# Altium PCB mega128PCB.PcbDoc (part 1 of 3)
Units mm, origin at the board's own origin, x right, y up, seen from the top; angles counter-clockwise.
Board outline 152.4 x 101.6 mm, 2 copper layers (Top Layer, Bottom Layer); 70 components, 96 nets, 393 pads, 80 vias.
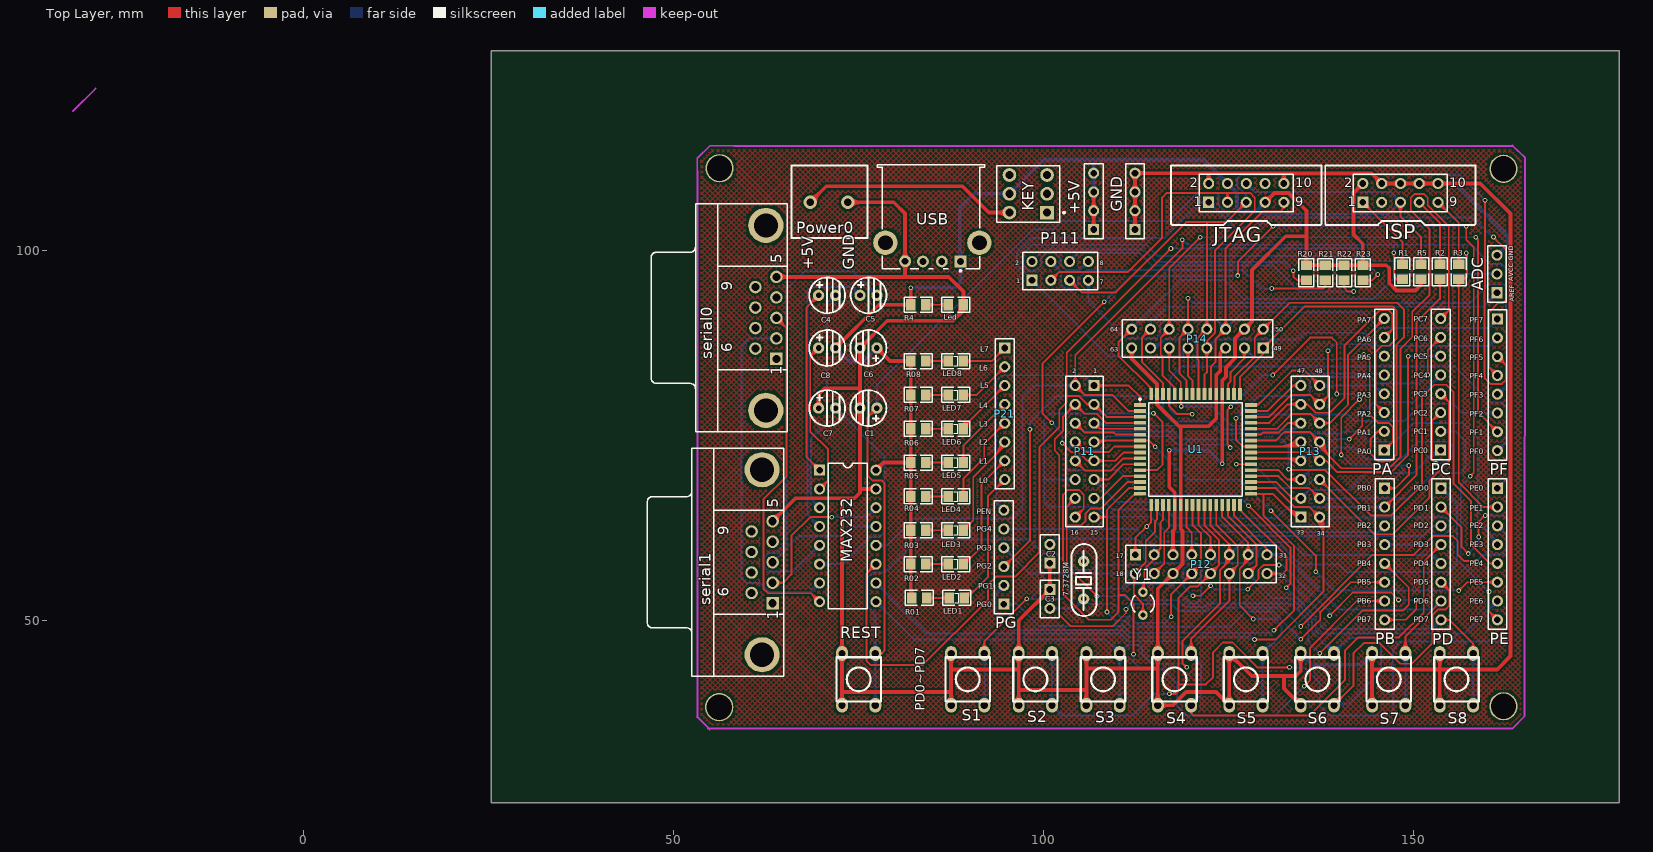
[diagram p0: Top Layer view]
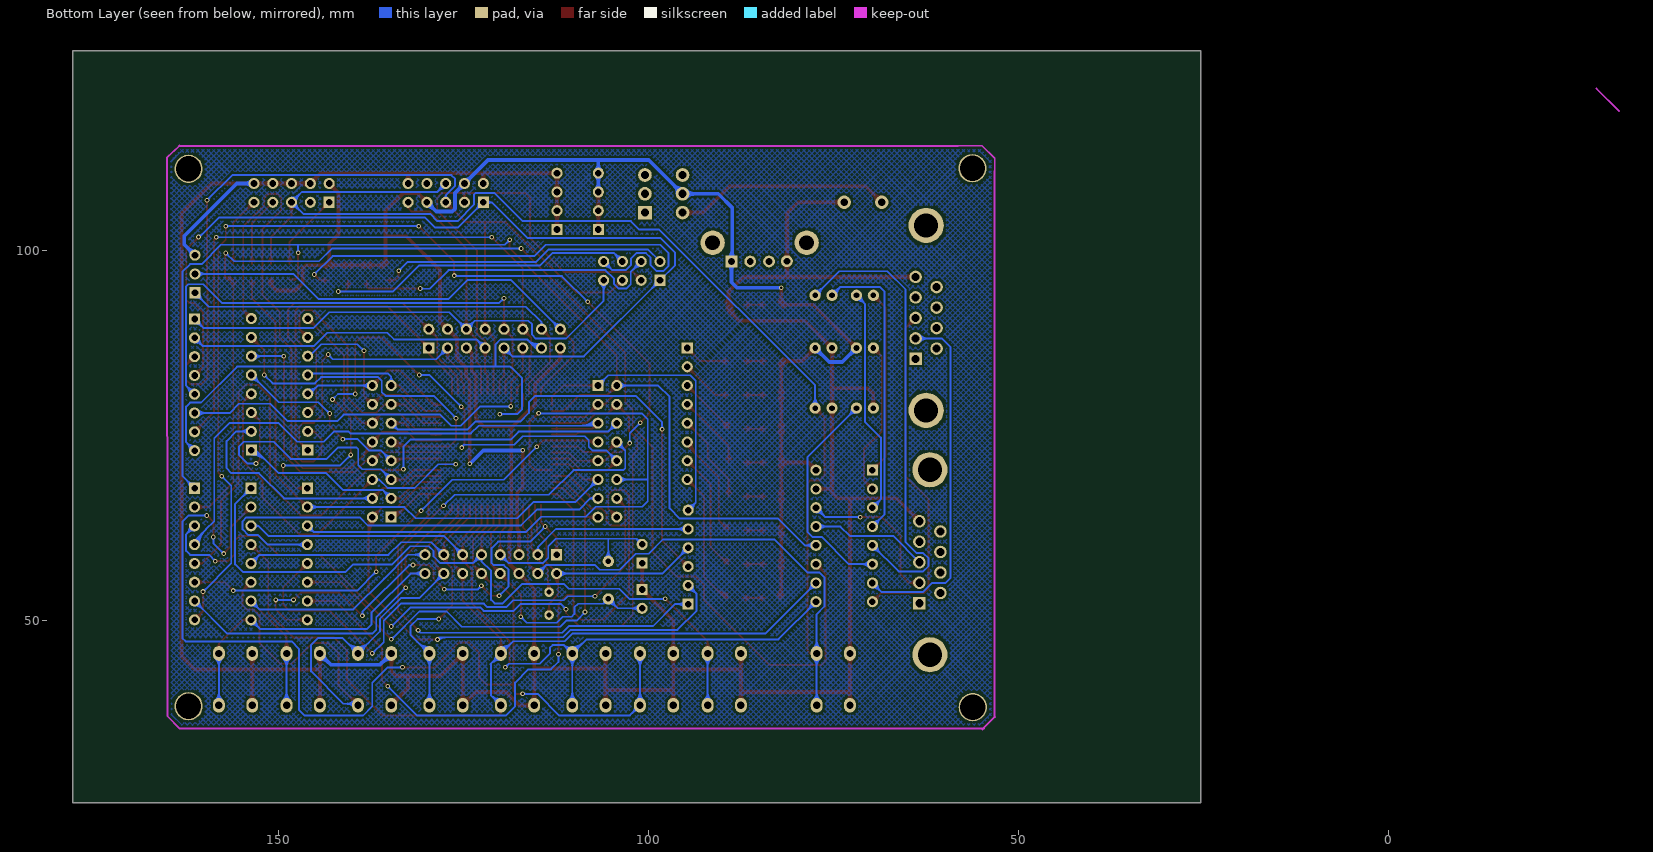
[diagram p1: Bottom Layer view, seen from below]

## Layer stack, top to bottom
Top Layer: signal copper 0.0356
Dielectric: dielectric 0.32, FR-4, Dk 4.8
Bottom Layer: signal copper 0.0356

## Board outline
25.4,25.4 177.8,25.4 177.8,127 25.4,127

## Design rules (kind name [scope] priority, off if disabled: settings)
Clearance [All] p1: gap=0.254
ComponentClearance [All] p1: gap=0.254 collisioncheckmode=3 verticalgap=0.254
PolygonConnect [All] p1: connectstyle=Relief reliefconductorwidth=0.254 reliefentries=4 polygonreliefangle="90 Angle"
RoutingVias [All] p1: holewidth=0.711 width=1.27 viastyle="Through Hole" minholewidth=0.711 minwidth=1.27 maxholewidth=0.711 maxwidth=1.27
SolderMaskExpansion [All] p1: expansion=0.102
TestPointUsage [All] p1: valid=0 allowmultiple=FALSE
Testpoint [All] p1: side=15 testpointundercomponent=TRUE minsize=1.016 maxsize=2.54 preferedsize=1.524 minholesize=0 maxholesize=1.016 preferedholesize=0.813 testpointgrid=0.025 style=1023 order=0123456789
Width GND [InNet('GND')] p1: maxlimit=0.508 minlimit=0.508 preferedwidth=0.508 // GND
Width VCC [InNet('VCC')] p2: maxlimit=0.508 minlimit=0.508 preferedwidth=0.508 // VCC
Width key_vcc [InNet('NetKEY_6')] p3: maxlimit=0.508 minlimit=0.508 preferedwidth=0.508 // VCC
Width [All] p4: maxlimit=0.254 minlimit=0.254 preferedwidth=0.254
17 further rules are at their usual default settings.

## Components (designator, comment, footprint, x,y, rotation, side; value= is the part's Value field where it differs from the comment)
7.3728M "JZ" JZ_ZC 105.461,58.039 r90 top
+5V "PZ_4" HDR-4 108.128,109.22 r90 top
ADC "PZ_3" HDR-3 162.484,100.584 r90 top
C1 "Cap Pol1" C-DJ-4 75.108,81.28 r180 top
C2 "Cap" CPDR 100.889,59.055 r90 top
C3 "Cap" CPDR 100.889,52.959 r270 top
C4 "Cap Pol1" C-DJ-4 72.06,91.44 r0 top
C5 "Cap Pol1" C-DJ-4 77.648,91.44 r0 top
C6 "Cap Pol1" C-DJ-4 75.108,89.408 r180 top
C7 "Cap Pol1" C-DJ-4 72.06,76.2 r0 top
C8 "Cap Pol1" C-DJ-4 72.06,84.328 r0 top
GND "PZ_4" HDR-4 113.716,109.22 r90 top
ISP "ISP" HDR-2x5 148.26,106.68 r0 top (schematic designator P1)
JTAG "JTAG" HDR-2x5 127.432,106.68 r0 top (schematic designator P2)
KEY "Header 3X2" DPDT-6 97.968,107.696 r180 top
Led "LED" TP-0805-R 90.729,91.44 r0 top
LED1 "LED" TP-0805-D 90.856,51.816 r0 top
LED2 "LED" TP-0805-D 90.729,56.388 r0 top
LED3 "LED" TP-0805-D 90.729,60.96 r0 top
LED4 "LED" TP-0805-D 90.729,65.532 r0 top
LED5 "LED" TP-0805-D 90.729,70.104 r0 top
LED6 "LED" TP-0805-D 90.729,74.676 r0 top
LED7 "LED" TP-0805-D 90.729,79.248 r0 top
LED8 "LED" TP-0805-D 90.729,83.82 r0 top
MAX232 "MAX232N" N016 73.584,61.468 r270 top
P11 "Header 8X2" HDR2X8 106.858,81.788 r270 top
P12 "Header 8X2" HDR2X8 112.446,58.928 r0 top
P13 "Header 8X2" HDR2X8 134.798,64.008 r90 top
P14 "Header 8X2" HDR2X8 129.718,86.868 r180 top
P21 "Header 8" HDR1X8 94.793,86.868 r270 top
P111 "Header 4X2" HDR2X4 98.476,96.012 r0 top
PA "PZ_8" HDR-8 146.101,85.725 r90 top
PB "PZ_8" HDR-8 146.101,55.245 r270 top
PC "PZ_8" HDR-8 153.721,85.725 r90 top
PD "PZ_8" HDR-8 153.721,55.245 r270 top
PE "PZ_8" HDR-8 161.341,55.245 r270 top
PF "PZ_8" HDR-8 161.341,78.105 r270 top
PG "PZ_6" HDR-6 95.809,58.42 r90 top
Power0 "Header 2" DYDZ 69.012,107.696 r90 top
R1 "Res2" TP-0805-R 149.784,99.695 r90 top
R01 "Res2" TP-0805-R 80.696,54.356 r180 top
R2 "Res2" TP-0805-R 154.864,99.695 r90 top
R02 "Res2" TP-0805-R 80.569,58.928 r180 top
R3 "Res2" TP-0805-R 157.404,99.695 r90 top
R03 "Res2" TP-0805-R 80.569,63.5 r180 top
R4 "Res2" TP-0805-R 80.569,93.98 r180 top
R04 "Res2" TP-0805-R 80.569,68.072 r180 top
R5 "Res2" TP-0805-R 152.324,99.695 r90 top
R05 "Res2" TP-0805-R 80.569,72.644 r180 top
R06 "Res2" TP-0805-R 80.569,77.216 r180 top
R07 "Res2" TP-0805-R 80.569,81.788 r180 top
R08 "Res2" TP-0805-R 80.569,86.36 r180 top
R20 "Res2" TP-0805-R 136.83,99.568 r90 top
R21 "Res2" TP-0805-R 139.37,99.568 r90 top
R22 "Res2" TP-0805-R 141.91,99.568 r90 top
R23 "Res2" TP-0805-R 144.45,99.568 r90 top
REST "AJKG" an-6*6 80.188,48.26 r90 top
S1 "AJKG" an-6*6 94.92,48.26 r90 top
S2 "AJKG" an-6*6 104.064,48.26 r90 top
S3 "AJKG" an-6*6 113.208,48.26 r90 top
S4 "AJKG" an-6*6 122.86,48.26 r90 top
S5 "AJKG" an-6*6 132.512,48.26 r90 top
S6 "AJKG" an-6*6 142.164,48.26 r90 top
S7 "AJKG" an-6*6 151.816,48.26 r90 top
S8 "AJKG" an-6*6 160.96,48.26 r90 top
serial0 "CKT_9" COM-9 63.932,102.616 r90 top
serial1 "CKT_9" COM-9 63.424,69.596 r90 top
U1 "ATmega128-16AI" 64A 120.574,73.152 r0 top
USB "PZ_4" USB-5V 81.204,101.092 r90 top
Y1 "XTAL" BCY-W2/D3.1 113.462,52.324 r0 top

## Footprints (in the part's own frame and the unit in brackets; to place one, negate y for a bottom-side part, rotate by r counter-clockwise, add the part's x,y. Pads: shape width x height; smd on the part's side, far side on the other; paste and mask are expansions set on the pad)
64A [mm] "QFP; 64 Leads; Body 14 x 14 mm; Pitch 0.8 mm"
  rect 1.6x0.5 smd: 1(-7.5,6) 2(-7.5,5.2) 3(-7.5,4.4) 4(-7.5,3.6) 5(-7.5,2.8) 6(-7.5,2) 7(-7.5,1.2) 8(-7.5,0.4) 9(-7.5,-0.4) 10(-7.5,-1.2) 11(-7.5,-2) 12(-7.5,-2.8) 13(-7.5,-3.6) 14(-7.5,-4.4) 15(-7.5,-5.2) 16(-7.5,-6) 33(7.5,-6) 34(7.5,-5.2) 35(7.5,-4.4) 36(7.5,-3.6) 37(7.5,-2.8) 38(7.5,-2) 39(7.5,-1.2) 40(7.5,-0.4) 41(7.5,0.4) 42(7.5,1.2) 43(7.5,2) 44(7.5,2.8) 45(7.5,3.6) 46(7.5,4.4) 47(7.5,5.2) 48(7.5,6)
  rect 0.5x1.6 smd: 17(-6,-7.5) 18(-5.2,-7.5) 19(-4.4,-7.5) 20(-3.6,-7.5) 21(-2.8,-7.5) 22(-2,-7.5) 23(-1.2,-7.5) 24(-0.4,-7.5) 25(0.4,-7.5) 26(1.2,-7.5) 27(2,-7.5) 28(2.8,-7.5) 29(3.6,-7.5) 30(4.4,-7.5) 31(5.2,-7.5) 32(6,-7.5) 49(6,7.5) 50(5.2,7.5) 51(4.4,7.5) 52(3.6,7.5) 53(2.8,7.5) 54(2,7.5) 55(1.2,7.5) 56(0.4,7.5) 57(-0.4,7.5) 58(-1.2,7.5) 59(-2,7.5) 60(-2.8,7.5) 61(-3.6,7.5) 62(-4.4,7.5) 63(-5.2,7.5) 64(-6,7.5)
  silkscreen extent -7.62,-6.3 6.3,6.92
an-6*6 [mm] "按键"
  oval 2x1.6 hole 1: 1(-9.675,7.381) 1(-2.675,7.381) 2(-9.675,2.881) 2(-2.675,2.881)
  silkscreen extent -9.17,2.13 -3.17,8.13
BCY-W2/D3.1 [mm] "Crystal, Thru-Hole; 2 Leads; Body 3.1 x 8.2 mm (Dia.xH)"
  round 1.3 hole 0.7: 1(0,1.55) 2(0,-1.55)
  silkscreen extent -1.55,-1.19 1.55,1.17
C-DJ-4 [mil] "电容4mm"
  round 60 hole 30: 1(-95,100) 2(-5,100)
  silkscreen extent -145,5 46,195
COM-9 [mm] "串口通信口"
  rect 1.69x1.69 hole 1.09: 1(-17.224,0.002)
  round 1.69 hole 1.09: 2(-14.454,0.002) 3(-11.684,0.002) 4(-8.914,0.002) 5(-6.144,0.002) 6(-15.839,2.842) 7(-13.069,2.842) 8(-10.299,2.842) 9(-7.529,2.842)
  round 4.76 hole 3.26: 10(-24.179,1.422) 11(0.811,1.422)
  silkscreen extent -27.08,-1.48 3.72,16.92
CPDR [mm] "瓷片电容"
  rect 1.5x1.5 hole 0.9: 1(-1.27,0)
  round 1.5 hole 0.9: 2(1.27,0)
  silkscreen extent -2.54,-1.27 2.54,1.27
DPDT-6 [mm] "Double-Pole, Double-Throw Switch; 6 Leads"
  rect 1.85x1.85 hole 1.1: 1(-2.54,2.54)
  round 1.85 hole 1.1: 2(-2.54,0) 3(-2.54,-2.54) 4(2.54,-2.54) 5(2.54,0) 6(2.54,2.54)
  silkscreen extent -4.96,-3.81 4.28,3.81
DYDZ [mil] "接线端子"
  round 71.81 hole 39.37: 1(-45,20) 2(-45,-180)
  silkscreen extent -235,-285 150,120
HDR1X8 [mm] "Connector; Header; 8 Position"
  rect 1.5x1.5 hole 0.9: 1(0,0)
  round 1.5 hole 0.9: 2(2.54,0) 3(5.08,0) 4(7.62,0) 5(10.16,0) 6(12.7,0) 7(15.24,0) 8(17.78,0)
  silkscreen extent -1.27,-1.27 19.05,1.27
HDR2X4 [mm] "Connector; Header; 4x2 Position"
  rect 1.5x1.5 hole 0.9: 1(0,0)
  round 1.5 hole 0.9: 2(0,2.54) 3(2.54,0) 4(2.54,2.54) 5(5.08,0) 6(5.08,2.54) 7(7.62,0) 8(7.62,2.54)
  silkscreen extent -1.27,-1.27 8.89,3.81
HDR2X8 [mm] "Connector; Header; 8x2 Position"
  rect 1.5x1.5 hole 0.9: 1(0,0)
  round 1.5 hole 0.9: 2(0,-2.54) 3(2.54,0) 4(2.54,-2.54) 5(5.08,0) 6(5.08,-2.54) 7(7.62,0) 8(7.62,-2.54) 9(10.16,0) 10(10.16,-2.54) 11(12.7,0) 12(12.7,-2.54) 13(15.24,0) 14(15.24,-2.54) 15(17.78,0) 16(17.78,-2.54)
  silkscreen extent -1.27,-3.81 19.05,1.27
HDR-2x5 [mm] "下载口"
  rect 1.5x1.5 hole 0.9: 1(-5.08,-0.127)
  round 1.5 hole 0.9: 2(-5.08,2.413) 3(-2.54,-0.127) 4(-2.54,2.413) 5(0,-0.127) 6(0,2.413) 7(2.54,-0.127) 8(2.54,2.413) 9(5.08,-0.127) 10(5.08,2.413)
  silkscreen extent -10.16,-3.17 10.16,4.83
HDR-3 [mm] "3排针"
  rect 1.5x1.5 hole 0.9: 1(-6.253,1.165)
  round 1.5 hole 0.9: 2(-3.713,1.165) 3(-1.173,1.165)
  silkscreen extent -7.52,-0.11 0.1,2.43
HDR-4 [mm] "4排针"
  rect 1.5x1.5 hole 0.9: 1(-6.35,1.322)
  round 1.5 hole 0.9: 2(-3.81,1.322) 3(-1.27,1.322) 4(1.27,1.322)
  silkscreen extent -7.62,0.05 2.54,2.59
HDR-6 [mm] "6排针"
  rect 1.5x1.5 hole 0.9: 1(-6.175,1.133)
  round 1.5 hole 0.9: 2(-3.635,1.133) 3(-1.095,1.133) 4(1.445,1.133) 5(3.985,1.133) 6(6.525,1.133)
  silkscreen extent -7.44,-0.14 7.8,2.4
HDR-8 [mm] "8排针"
  rect 1.5x1.5 hole 0.9: 1(-12.669,0.023)
  round 1.5 hole 0.9: 2(-10.129,0.023) 3(-7.589,0.023) 4(-5.049,0.023) 5(-2.509,0.023) 6(0.031,0.023) 7(2.571,0.023) 8(5.111,0.023)
  silkscreen extent -13.94,-1.25 6.38,1.29
JZ_ZC [mil] "晶振"
  round 60 hole 30: 1(-200,0) 2(0,0)
  silkscreen extent -292,-68 92,65
N016 [mm] "DIP; 16 Leads; Row Spacing 7.62 mm; Pitch 2.54 mm"
  rect 1.5x1.5 hole 0.9: 1(-8.89,-3.81)
  round 1.5 hole 0.9: 2(-6.35,-3.81) 3(-3.81,-3.81) 4(-1.27,-3.81) 5(1.27,-3.81) 6(3.81,-3.81) 7(6.35,-3.81) 8(8.89,-3.81) 9(8.89,3.81) 10(6.35,3.81) 11(3.81,3.81) 12(1.27,3.81) 13(-1.27,3.81) 14(-3.81,3.81) 15(-6.35,3.81) 16(-8.89,3.81)
  silkscreen extent -9.85,-2.65 9.85,2.65
TP-0805-D [mm] "贴片二极管"
  rect 1.3x1.5 smd: 1(-3.556,1.27) 2(-1.524,1.27)
  silkscreen extent -4.44,0.25 -0.64,2.29
TP-0805-R [mm] "贴片0805"
  rect 1.3x1.5 smd: 1(-3.556,1.27) 2(-1.524,1.27)
  silkscreen extent -4.44,0.25 -0.64,2.29
USB-5V [mm] "USB接口"
  rect 1.6x1.6 hole 0.92: 1(-2.54,-7.62)
  round 1.6 hole 0.92: 2(-2.54,-5.08) 3(-2.54,-2.54) 4(-2.503,-0.124)
  round 3.3 hole 2: 5(0,2.54) 6(0,-10.16)
  silkscreen extent -3.93,-10.87 10.5,3.63

## Part data
7.3728M: "晶振"
+5V GND USB: "排针——4"
ADC: "排针——3"
C1 C4 C5 C6 C7 C8: "Polarized Capacitor (Radial)"
C2 C3: "Capacitor"
ISP JTAG: library part "Header 5X2", "Header, 5-Pin, Dual row"
KEY: "Header, 3-Pin, Dual row"
Led LED1 LED2 LED3 LED4 LED5 LED6 LED7 LED8: "发光二极管"
MAX232: "Dual EIA-232 Driver/Receiver"
P11 P12 P13 P14: "Header, 8-Pin, Dual row"
P21: "Header, 8-Pin"
P111: "Header, 4-Pin, Dual row"
PA PB PC PD PE PF: "排针——8"
PG: "排针——6"
Power0: "Header, 2-Pin"
R1 R01 R2 R02 R3 R03 R4 R04 R5 R05 R06 R07 R08 R20 R21 R22 R23: "Resistor"
REST S1 S2 S3 S4 S5 S6 S7 S8: "按键开关"
serial0 serial1: "9针串口头_母"
U1: "8-Bit AVR Microcontroller with 128K Bytes of In-System Programmable Flash Memory"
Y1: "Crystal Oscillator"

## Free pads (board coordinates)
  round 3.81 hole 3.4: 1(56.21,38.329) 1(56.261,111.15) 1(162.179,38.456) 1(162.179,111.074)

## Via types
v1: diameter 0.635, hole 0.356, Top Layer to Bottom Layer, 80 vias

## Nets (pads, with @x,y where several pads share a name; then routed paths per layer and width w, separated by ;. In a path a pad name is that pad's centre, name@x,y a point inside that pad or via, vN(x,y) a via of type N, cw(c..) or ccw(c..) an arc to the next point about the centre after c; other vN are vias at no path point)
AREF: ADC.1 P14.14 U1.62 | length 68.7
  Top Layer w0.254: P14.14@113.855,89.408 cw(c112.351,89.408) 113.414,88.344 cw(c114.478,87.281) P14.14@114.478,88.785 ; P14.14@114.109,89.408 cw(c113.218,89.408) 113.848,88.778 cw(c114.478,88.148) P14.14@114.478,89.039 ; P14.14@114.478,89.408 113.335,88.265 113.335,84.975 116.174,82.136 U1.62@116.174,80.652 ; U1.62@116.087,81.289 ccw(c115.877,81.499) 116.174,81.499 ccw(c116.471,81.499) U1.62@116.261,81.289
  Bottom Layer w0.254: P14.14@114.244,89.986 ccw(c114.104,90.332) 114.478,90.332 ; P14.14@114.478,89.408 114.478,90.332 ; P14.14@114.711,89.986 cw(c114.852,90.332) 114.478,90.332 ; ADC.1@160.696,94.331 cw(c159.192,94.331) 160.255,93.267 cw(c161.319,92.204) ADC.1@161.319,93.708 ; ADC.1@160.95,94.331 cw(c160.059,94.331) 160.689,93.701 cw(c161.319,93.071) ADC.1@161.319,93.962 ; ADC.1@161.319,94.331 159.429,92.441 116.587,92.441 114.478,90.332
AVCC: ADC.2 P14.16 U1.64 | length 77.9
  Top Layer w0.254: P14.16@111.315,89.408 cw(c109.811,89.408) 110.874,88.344 cw(c111.938,87.281) P14.16@111.938,88.785 ; P14.16@111.569,89.408 cw(c110.678,89.408) 111.308,88.778 cw(c111.938,88.148) P14.16@111.938,89.039 ; P14.16@111.938,89.408 110.16,87.63 110.16,85.833 114.574,81.419 U1.64@114.574,80.652 ; 114.21,81.782 cw(c113.63,81.202) U1.64@114.451,81.202
  Bottom Layer w0.254: P14.16@111.938,89.408 118.577,96.048 124.491,96.048 127.082,93.457 144.618,93.457 148.032,96.871 ADC.2@161.319,96.871 ; P14.16@111.938,89.777 ccw(c111.938,90.668) 112.568,90.038 ccw(c113.198,89.408) P14.16@112.307,89.408 ; P14.16@111.938,90.031 ccw(c111.938,91.535) 113.001,90.472 ccw(c114.065,89.408) P14.16@112.561,89.408 ; ADC.2@160.878,96.43 ccw(c159.815,95.367) 159.815,96.871 ccw(c159.815,98.375) ADC.2@160.878,97.312 ; ADC.2@161.058,96.61 ccw(c160.428,95.98) 160.428,96.871 ccw(c160.428,97.762) ADC.2@161.058,97.132
GND: ADC.3 C1.2 C2.1 C3.1 C6.2 C7.1 GND.1 GND.2 GND.3 GND.4 ISP.4 ISP.6 ISP.8 ISP.10 JTAG.2 JTAG.10 Led.2 MAX232.15 P12.6 P14.5 P14.15 Power0.2 REST.1 S1.1 S2.1 S3.1 S4.1 S5.1 S6.1 S7.1 S8.1 serial0.5 serial1.5 U1.22 U1.53 U1.63 USB.4 | length 628.7
  Top Layer w0.508: serial1.5@63.422,63.452 66.518,66.548 74.473,66.548 75.235,67.31 C6.2@75.235,86.868 ; serial1.5@63.422,64.043 ccw(c63.422,65.47) 64.431,64.461 ccw(c65.44,63.452) serial1.5@64.013,63.452 ; serial0.5@63.93,96.472 87.221,96.472 89.205,94.488 Led.2@89.205,92.71 89.205,91.948 ; serial0.5@64.348,96.054 cw(c65.357,95.045) 65.357,96.472 cw(c65.357,97.899) serial0.5@64.348,96.89 ; C7.1@69.288,79.099 ccw(c68.42,79.966) 69.647,79.966 ccw(c70.873,79.966) C7.1@70.006,79.099 ; C7.1@69.647,78.74 69.647,80.645 70.409,81.407 75.235,81.407 ; REST.1@72.421,39.171 ccw(c71.489,40.103) 72.807,40.103 ccw(c74.125,40.103) REST.1@73.193,39.171 ; REST.1@72.421,44.999 cw(c71.489,44.067) 72.807,44.067 cw(c74.125,44.067) REST.1@73.193,44.999 ; REST.1@72.421,46.171 ccw(c71.489,47.103) 72.807,47.103 ccw(c74.125,47.103) REST.1@73.193,46.171 ; 72.695,66.548 72.807,66.436 REST.1@72.807,45.585 72.807,38.369 REST.1@72.822,38.354 ; 72.807,40.386 87.539,40.386 ; Power0.2@73.584,106.553 79.807,106.553 81.327,105.032 81.327,96.596 81.204,96.472 ; Power0.2@74.049,106.088 cw(c75.172,104.964) 75.172,106.553 cw(c75.172,108.142) Power0.2@74.049,107.018 ; C1.2@74.876,78.381 cw(c74.008,77.514) 75.235,77.514 cw(c76.461,77.514) C1.2@75.594,78.381 ; C1.2@74.876,79.099 ccw(c74.008,79.966) 75.235,79.966 ccw(c76.461,79.966) C1.2@75.594,79.099 ; C6.2@74.876,86.509 cw(c74.008,85.642) 75.235,85.642 cw(c76.461,85.642) C6.2@75.594,86.509 ; C6.2@74.981,87.122 C6.2@75.235,86.868 ; 75.235,67.818 MAX232.15@77.394,67.818 ; C6.2@75.235,87.376 ccw(c75.235,88.602) 76.102,87.735 ccw(c76.969,86.868) C6.2@75.743,86.868 ; MAX232.15@77.043,67.467 ccw(c76.196,66.621) 76.196,67.818 ccw(c76.196,69.015) MAX232.15@77.043,68.169 ; USB.4@80.941,98.203 cw(c80.009,97.271) 81.327,97.271 cw(c82.646,97.271) USB.4@81.713,98.203 ; USB.4@80.941,98.976 ccw(c80.009,99.908) 81.327,99.908 ccw(c82.646,99.908) USB.4@81.713,98.976 ; S1.1@87.153,39.171 ccw(c86.221,40.103) 87.539,40.103 ccw(c88.857,40.103) S1.1@87.925,39.171 ; S1.1@87.153,44.999 cw(c86.221,44.067) 87.539,44.067 cw(c88.857,44.067) S1.1@87.925,44.999 ; S1.1@87.539,38.585 S1.1@87.539,45.585 ; 87.539,43.434 96.683,43.434 ; 88.139,90.882 ccw(c86.517,92.504) Led.2@88.809,92.594 ; Led.2@88.925,93.09 ccw(c88.249,93.766) 89.205,93.766 ccw(c90.161,93.766) Led.2@89.485,93.09 ; 88.96,91.703 ccw(c88.097,92.566) Led.2@89.317,92.614 ; Led.2@89.018,92.261 cw(c88.85,91.948) 89.205,91.948 ; Led.2@89.392,92.261 ccw(c89.56,91.948) 89.205,91.948 ; S2.1@96.297,39.171 ccw(c95.365,40.103) 96.683,40.103 ccw(c98.001,40.103) S2.1@97.069,39.171 ; S2.1@96.297,44.999 cw(c95.365,44.067) 96.683,44.067 cw(c98.001,44.067) S2.1@97.069,44.999 ; S2.1@96.297,46.171 ccw(c95.365,47.103) 96.683,47.103 ccw(c98.001,47.103) S2.1@97.069,46.171 ; S2.1@96.683,38.585 96.683,38.593 S2.1@96.683,45.585 96.683,50.023 C3.1@100.889,54.229 C2.1@100.889,57.785 ; 96.683,40.64 105.827,40.64 ; C3.1@100.393,54.229 cw(c99.195,54.229) 100.042,53.382 cw(c100.889,52.536) C3.1@100.889,53.733 ; C3.1@100.538,54.58 ccw(c99.691,55.426) 100.889,55.426 ccw(c102.086,55.426) C3.1@101.24,54.58 ; C2.1@100.538,57.434 cw(c99.691,56.588) 100.889,56.588 cw(c102.086,56.588) C2.1@101.24,57.434 ; S3.1@105.441,39.171 ccw(c104.509,40.103) 105.827,40.103 ccw(c107.145,40.103) S3.1@106.213,39.171 ; S3.1@105.441,44.999 cw(c104.509,44.067) 105.827,44.067 cw(c107.145,44.067) S3.1@106.213,44.999 ; S3.1@105.827,38.585 S3.1@105.827,45.585 ; 105.827,43.561 115.479,43.561 ; P14.15@111.587,86.517 cw(c110.74,85.671) 111.938,85.671 cw(c113.135,85.671) P14.15@112.289,86.517 ; P14.15@111.938,86.868 111.938,85.448 115.374,82.012 U1.63@115.374,80.652 115.374,79.241 118.313,76.302 ; GND.1@112.043,103.221 ccw(c111.196,104.067) 112.394,104.067 ccw(c113.591,104.067) GND.1@112.745,103.221 ; GND.2@112.043,105.059 cw(c111.196,104.213) 112.394,104.213 cw(c113.591,104.213) GND.2@112.745,105.059 ; GND.2@112.043,105.761 ccw(c111.196,106.607) 112.394,106.607 ccw(c113.591,106.607) GND.2@112.745,105.761 ; GND.3@112.043,107.599 cw(c111.196,106.753) 112.394,106.753 cw(c113.591,106.753) GND.3@112.745,107.599 ; GND.3@112.043,108.301 ccw(c111.196,109.147) 112.394,109.147 ccw(c113.591,109.147) GND.3@112.745,108.301 ; GND.4@112.043,110.139 cw(c111.196,109.293) 112.394,109.293 cw(c113.591,109.293) 112.745,110.139 cw(c113.591,109.293) 113.591,110.49 cw(c113.591,111.687) GND.4@112.745,110.841 ; GND.1@112.394,102.87 GND.2@112.394,105.41 GND.3@112.394,107.95 GND.4@112.394,110.49 144.323,110.49 ISP.4@145.72,109.093 ISP.6@148.26,109.093 ISP.8@150.8,109.093 ISP.10@153.34,109.093 159.055,109.093 163.119,105.029 ; S4.1@115.093,39.171 ccw(c114.161,40.103) 115.479,40.103 ccw(c116.797,40.103) S4.1@115.865,39.171 ; S4.1@115.093,44.999 cw(c114.161,44.067) 115.479,44.067 cw(c116.797,44.067) S4.1@115.865,44.999 ; S4.1@115.093,46.171 ccw(c114.161,47.103) 115.479,47.103 ccw(c116.797,47.103) S4.1@115.865,46.171 ; S4.1@115.479,38.585 S4.1@115.479,38.593 ; S4.1@115.865,38.199 cw(c116.817,37.247) 116.817,38.593 ; S4.1@115.865,38.971 ccw(c116.777,39.883) 116.777,38.593 ; P12.6@117.03,56.388 cw(c115.832,56.388) 116.679,55.541 cw(c117.526,54.695) P12.6@117.526,55.892 ; P12.6@117.526,56.884 ccw(c117.526,58.081) 118.373,57.235 ccw(c119.219,56.388) P12.6@118.022,56.388 ; JTAG.2@122.001,109.444 ccw(c121.154,110.29) 122.352,110.29 ccw(c123.549,110.29) JTAG.2@122.703,109.444 ; JTAG.2@122.352,109.093 122.352,110.49 ; 123.858,39.858 ccw(c125.131,41.132) S5.1@125.131,39.331 ; P14.5@124.146,86.806 cw(c123.365,86.708) 123.921,86.151 ; 124.34,39.376 cw(c123.75,38.785) S5.1@124.585,38.785 ; P14.5@124.576,86.376 ccw(c124.478,85.595) 123.921,86.151 ; P14.5@124.638,86.868 123.921,86.151 ; S5.1@124.745,39.171 ccw(c123.813,40.103) 125.131,40.103 ccw(c126.449,40.103) S5.1@125.517,39.171 ; S5.1@124.745,44.999 cw(c123.813,44.067) 125.131,44.067 cw(c126.449,44.067) S5.1@125.517,44.999 ; S5.1@125.131,44.839 cw(c125.131,43.038) 126.405,44.312 ; S5.1@125.677,45.385 ccw(c126.512,45.385) 125.922,44.794 ; JTAG.10@132.161,109.444 ccw(c131.314,110.29) 132.512,110.29 ccw(c133.709,110.29) JTAG.10@132.863,109.444 ; 132.512,42.553 132.512,40.856 S6.1@134.783,38.585 ; JTAG.10@132.512,109.093 132.512,110.49 ; 133.51,39.858 ccw(c134.783,41.132) S6.1@134.783,39.331 ; 133.992,39.376 cw(c133.402,38.785) S6.1@134.237,38.785 ; S6.1@134.397,44.999 cw(c133.465,44.067) 134.783,44.067 cw(c136.101,44.067) S6.1@135.169,44.999 ; S6.1@134.783,45.585 134.783,43.216 134.12,42.553 128.163,42.553 S5.1@125.131,45.585 S5.1@125.131,38.585 123.33,40.386 119.304,40.386 117.511,38.593 S4.1@115.479,38.593 ; S7.1@144.049,39.171 ccw(c143.117,40.103) 144.435,40.103 ccw(c145.753,40.103) S7.1@144.821,39.171 ; S7.1@144.049,44.999 cw(c143.117,44.067) 144.435,44.067 cw(c145.753,44.067) S7.1@144.821,44.999 ; S7.1@144.435,38.585 S7.1@144.435,45.585 ; 144.435,43.434 161.341,43.434 163.13,45.223 163.13,105.029 ; ISP.4@145.224,109.093 ccw(c144.026,109.093) 144.873,109.94 ccw(c145.72,110.786) ISP.4@145.72,109.589 ; ISP.4@146.071,108.742 cw(c146.917,107.896) 146.917,109.093 cw(c146.917,110.29) ISP.4@146.071,109.444 ; ISP.6@147.909,108.742 ccw(c147.062,107.896) 147.062,109.093 ccw(c147.062,110.29) ISP.6@147.909,109.444 ; ISP.6@148.611,108.742 cw(c149.457,107.896) 149.457,109.093 cw(c149.457,110.29) ISP.6@148.611,109.444 ; ISP.8@150.449,108.742 ccw(c149.602,107.896) 149.602,109.093 ccw(c149.602,110.29) ISP.8@150.449,109.444 ; ISP.8@151.151,108.742 cw(c151.997,107.896) 151.997,109.093 cw(c151.997,110.29) ISP.8@151.151,109.444 ; ISP.10@152.989,108.742 ccw(c152.142,107.896) 152.142,109.093 ccw(c152.142,110.29) ISP.10@152.989,109.444 ; S8.1@153.193,39.171 ccw(c152.261,40.103) 153.579,40.103 ccw(c154.897,40.103) S8.1@153.965,39.171 ; S8.1@153.193,44.999 cw(c152.261,44.067) 153.579,44.067 cw(c154.897,44.067) S8.1@153.965,44.999 ; S8.1@153.579,38.585 S8.1@153.579,45.585 ; ISP.10@153.691,108.742 cw(c154.537,107.896) 154.537,109.093 cw(c154.537,110.29) ISP.10@153.691,109.444 ; C6.2@75.235,86.868 78.918,90.551 87.808,90.551 89.205,91.948 ; S4.1@115.479,38.593 115.479,45.307 S4.1@115.479,45.585 115.479,54.341 P12.6@117.526,56.388 118.796,57.658 118.796,62.179 118.574,62.401 U1.22@118.574,65.652 118.574,76.041 118.313,76.302 ; 118.313,76.302 122.352,76.302 123.374,77.324 U1.53@123.374,80.652 123.374,83.204 123.921,83.752 123.921,86.151
  Bottom Layer w0.508: S6.1@134.783,44.839 cw(c134.783,42.983) 136.095,44.295 ; S6.1@134.783,45.585 134.806,45.585 136.322,44.069 142.926,44.069 144.435,45.578 S7.1@144.435,45.585 ; S6.1@135.329,45.385 ccw(c136.109,45.385) 135.558,44.833 ; 143.173,44.316 cw(c144.435,43.054) S7.1@144.435,44.839 ; 143.64,44.783 ccw(c143.037,45.385) S7.1@143.889,45.385 ; ISP.10@153.34,109.093 155.656,109.093 162.768,101.981 162.768,100.861 ADC.3@161.319,99.411 ; ISP.10@153.691,108.742 cw(c154.537,107.896) 154.537,109.093 cw(c154.537,110.29) ISP.10@153.691,109.444 ; ADC.3@161.319,99.907 ccw(c161.319,101.104) 162.166,100.258 ccw(c163.012,99.411) ADC.3@161.815,99.411
L0: LED1.2 P21.8 | length 26.5
  Top Layer w0.254: LED1.2@89.332,53.086 89.713,53.086 92.507,55.88 92.507,66.802 P21.8@94.793,69.088 ; LED1.2@89.332,53.201 ccw(c89.332,54.398) 90.179,53.552 ; LED1.2@89.332,53.455 ccw(c89.332,55.266) 90.612,53.985 ; LED1.2@89.332,53.709 ccw(c89.332,56.133) 91.046,54.419 ; P21.8@94.17,69.088 cw(c92.666,69.088) 93.729,68.024 cw(c94.793,66.961) P21.8@94.793,68.465 ; P21.8@94.424,69.088 cw(c93.533,69.088) 94.163,68.458 cw(c94.793,67.828) P21.8@94.793,68.719
L1: LED2.2 P21.7 | length 23
  Top Layer w0.254: LED2.2@89.205,57.658 89.332,57.658 91.629,59.956 91.629,68.465 P21.7@94.793,71.628 ; LED2.2@89.205,58.027 ccw(c89.205,59.224) 90.052,58.378 ; LED2.2@89.205,58.281 ccw(c89.205,60.092) 90.485,58.811 ; LED2.2@89.728,57.758 cw(c90.442,57.758) 89.937,58.263 ; P21.7@94.17,71.628 cw(c92.666,71.628) 93.729,70.564 cw(c94.793,69.501) P21.7@94.793,71.005 ; P21.7@94.424,71.628 cw(c93.533,71.628) 94.163,70.998 cw(c94.793,70.368) P21.7@94.793,71.259
L2: LED3.2 P21.6 | length 21.9
  Top Layer w0.254: LED3.2@89.205,62.23 90.54,63.566 90.54,69.408 94.793,73.66 P21.6@94.793,74.168 ; LED3.2@89.205,62.599 ccw(c89.205,63.49) LED3.2@89.835,62.86 ; LED3.2@89.205,62.853 ccw(c89.205,64.357) 90.268,63.294 ; LED3.2@89.728,62.33 cw(c90.749,62.33) 90.027,63.052 ; 93.37,72.237 ccw(c91.439,74.168) P21.6@94.17,74.168 ; 93.804,72.671 ccw(c92.307,74.168) P21.6@94.424,74.168 ; 94.237,73.104 ccw(c93.174,74.168) P21.6@94.678,74.168
L3: LED4.2 P21.5 | length 18
  Top Layer w0.254: LED4.2@88.835,67.272 ccw(c87.942,68.165) 89.205,68.165 ccw(c90.467,68.165) LED4.2@89.575,67.272 ; LED4.2@89.205,66.802 89.205,69.215 92.021,72.032 92.021,73.937 P21.5@94.793,76.708 ; P21.5@94.17,76.708 cw(c92.666,76.708) 93.729,75.644 cw(c94.793,74.581) P21.5@94.793,76.085 ; P21.5@94.424,76.708 cw(c93.533,76.708) 94.163,76.078 cw(c94.793,75.448) P21.5@94.793,76.339
L4: LED5.2 P21.4 | length 15.9
  Top Layer w0.254: LED5.2@88.835,71.844 ccw(c87.942,72.737) 89.205,72.737 ccw(c90.467,72.737) LED5.2@89.575,71.844 ; LED5.2@89.205,71.374 89.205,73.66 P21.4@94.793,79.248 ; P21.4@94.17,79.248 cw(c92.666,79.248) 93.729,78.184 cw(c94.793,77.121) P21.4@94.793,78.625 ; P21.4@94.424,79.248 cw(c93.533,79.248) 94.163,78.618 cw(c94.793,77.988) P21.4@94.793,78.879
L5: LED6.2 P21.3 | length 16.3
  Top Layer w0.254: LED6.2@89.084,76.555 ccw(c89.047,76.708) 89.205,76.708 ; LED6.2@89.205,75.946 89.205,76.708 ; LED6.2@89.205,76.569 ccw(c89.205,77.46) 89.835,76.83 ; LED6.2@89.279,76.564 ccw(c89.352,77.069) 89.713,76.708 ; LED6.2@89.326,76.555 cw(c89.362,76.708) 89.205,76.708 ; LED6.2@89.474,76.046 cw(c90.495,76.046) 89.773,76.768 ; LED6.2@89.659,76.305 cw(c89.949,76.471) 89.713,76.708 ; LED6.2@89.728,76.046 cw(c91.362,76.046) 90.207,77.202 ; P21.3@94.17,81.788 cw(c92.666,81.788) 93.729,80.724 cw(c94.793,79.661) P21.3@94.793,81.165 ; P21.3@94.424,81.788 cw(c93.533,81.788) 94.163,81.158 cw(c94.793,80.528) P21.3@94.793,81.419 ; P21.3@94.793,81.788 89.713,76.708 ; 89.205,76.708 89.713,76.708
L6: LED7.2 P21.2 | length 12.9
  Top Layer w0.254: LED7.2@89.205,80.518 90.983,80.518 P21.2@94.793,84.328 ; LED7.2@89.575,80.148 cw(c90.467,79.255) 90.467,80.518 cw(c90.467,81.781) LED7.2@89.575,80.888 ; P21.2@94.17,84.328 cw(c92.666,84.328) 93.729,83.264 cw(c94.793,82.201) P21.2@94.793,83.705 ; P21.2@94.424,84.328 cw(c93.533,84.328) 94.163,83.698 cw(c94.793,83.068) P21.2@94.793,83.959
L7: LED8.2 P21.1 | length 12.1
  Top Layer w0.254: LED8.2@89.205,85.09 93.015,85.09 P21.1@94.793,86.868 ; LED8.2@89.575,84.72 cw(c90.467,83.827) 90.467,85.09 cw(c90.467,86.353) LED8.2@89.575,85.46 ; P21.1@94.17,86.868 cw(c92.666,86.868) 93.729,85.804 cw(c94.793,84.741) P21.1@94.793,86.245 ; P21.1@94.424,86.868 cw(c93.533,86.868) 94.163,86.238 cw(c94.793,85.608) P21.1@94.793,86.499
NetC4_1: C4.1 MAX232.1 | length 32.7
  Top Layer w0.254: C4.1@69.012,93.98 cw(c67.479,93.98) 68.563,92.896 cw(c69.647,91.812) C4.1@69.647,93.345 ; MAX232.1@69.151,70.358 ccw(c67.647,70.358) 68.71,71.422 ccw(c69.774,72.485) MAX232.1@69.774,70.981 ; C4.1@69.266,93.98 cw(c68.346,93.98) 68.996,93.33 cw(c69.647,92.679) C4.1@69.647,93.599 ; MAX232.1@69.405,70.358 ccw(c68.514,70.358) 69.144,70.988 ccw(c69.774,71.618) MAX232.1@69.774,70.727 ; C4.1@69.647,93.98 67.996,92.329 67.996,72.136 MAX232.1@69.774,70.358
NetC4_2: C4.2 MAX232.3 | length 38.2
  Bottom Layer w0.254: MAX232.3@69.151,65.278 ccw(c67.647,65.278) 68.71,66.342 ccw(c69.774,67.405) MAX232.3@69.774,65.901 ; MAX232.3@69.405,65.278 ccw(c68.514,65.278) 69.144,65.908 ccw(c69.774,66.538) MAX232.3@69.774,65.647 ; MAX232.3@69.774,65.278 68.631,66.421 68.631,74.752 70.79,76.911 70.79,92.837 C4.2@71.933,93.98 ; C4.2@71.298,93.98 cw(c69.765,93.98) 70.849,92.896 cw(c71.933,91.812) C4.2@71.933,93.345 ; C4.2@71.552,93.98 cw(c70.632,93.98) 71.282,93.33 cw(c71.933,92.679) C4.2@71.933,93.599
NetC5_1: C5.1 MAX232.4 | length 47.9
  Bottom Layer w0.254: MAX232.4@69.151,62.738 ccw(c67.647,62.738) 68.71,63.802 ccw(c69.774,64.865) MAX232.4@69.774,63.361 ; MAX232.4@69.405,62.738 ccw(c68.514,62.738) 69.144,63.368 ccw(c69.774,63.998) MAX232.4@69.774,63.107 ; MAX232.4@69.774,62.738 68.123,64.389 68.123,94.488 68.758,95.123 74.092,95.123 C5.1@75.235,93.98 ; C5.1@74.6,93.98 ccw(c73.067,93.98) 74.151,95.064 ccw(c75.235,96.148) C5.1@75.235,94.615 ; C5.1@74.854,93.98 ccw(c73.934,93.98) 74.584,94.63 ccw(c75.235,95.281) C5.1@75.235,94.361
NetC5_2: C5.2 MAX232.5 | length 70.8
  Bottom Layer w0.254: MAX232.5@69.151,60.198 cw(c67.647,60.198) 68.71,59.134 cw(c69.774,58.071) MAX232.5@69.774,59.575 ; MAX232.5@69.405,60.198 cw(c68.514,60.198) 69.144,59.568 cw(c69.774,58.938) MAX232.5@69.774,59.829 ; MAX232.5@69.774,60.198 66.243,56.667 62.916,56.667 62.179,57.404 62.179,58.42 62.916,59.157 63.805,59.157 65.278,60.63 65.278,94.767 67.742,97.231 74.27,97.231 C5.2@77.521,93.98 ; C5.2@76.886,93.98 ccw(c75.353,93.98) 76.437,95.064 ccw(c77.521,96.148) C5.2@77.521,94.615 ; C5.2@77.14,93.98 ccw(c76.22,93.98) 76.87,94.63 ccw(c77.521,95.281) C5.2@77.521,94.361
NetC7_2: C7.2 MAX232.6 | length 37.7
  Bottom Layer w0.254: MAX232.6@69.774,57.658 72.949,57.658 76.62,61.329 77.89,61.329 78.537,61.976 78.537,72.136 C7.2@71.933,78.74 ; MAX232.6@70.035,57.397 cw(c70.665,56.767) 70.665,57.658 cw(c70.665,58.549) MAX232.6@70.035,57.919 ; MAX232.6@70.214,57.217 cw(c71.278,56.154) 71.278,57.658 cw(c71.278,59.162) MAX232.6@70.214,58.099 ; C7.2@71.933,78.105 cw(c71.933,76.572) 73.017,77.656 cw(c74.101,78.74) C7.2@72.568,78.74 ; C7.2@71.933,78.359 cw(c71.933,77.439) 72.583,78.09 cw(c73.234,78.74) C7.2@72.314,78.74
NetC8_1: C8.1 MAX232.2 | length 28.6
  Top Layer w0.254: C8.1@69.012,86.868 cw(c67.479,86.868) 68.563,85.784 cw(c69.647,84.7) C8.1@69.647,86.233 ; C8.1@69.266,86.868 cw(c68.346,86.868) 68.996,86.218 cw(c69.647,85.567) C8.1@69.647,86.487 ; C8.1@69.647,86.868 68.504,85.725 68.504,75.565 70.917,73.152 70.917,68.961 MAX232.2@69.774,67.818 ; MAX232.2@69.774,68.187 ccw(c69.774,69.078) 70.404,68.448 ccw(c71.034,67.818) MAX232.2@70.143,67.818 ; MAX232.2@69.774,68.441 ccw(c69.774,69.945) 70.837,68.882 ccw(c71.901,67.818) MAX232.2@70.397,67.818
NetKEY_6: KEY.6 Power0.1 | length 34.3
  Top Layer w0.508: Power0.1@68.504,106.553 70.663,108.712 89.078,108.712 92.634,105.156 KEY.6@95.428,105.156 ; Power0.1@68.504,107.211 ccw(c68.504,108.8) 69.627,107.676 ccw(c70.75,106.553) Power0.1@69.162,106.553 ; KEY.6@94.953,104.682 ccw(c93.808,103.536) 93.808,105.156 ccw(c93.808,106.776) KEY.6@94.953,105.63
NetLED1_1: LED1.1 R01.1 | length 7
  Top Layer w0.254: R01.1@84.252,53.086 LED1.1@87.3,53.086 ; R01.1@84.622,52.716 cw(c85.514,51.823) 85.514,53.086 cw(c85.514,54.349) R01.1@84.622,53.456 ; LED1.1@86.93,52.716 ccw(c86.037,51.823) 86.037,53.086 ccw(c86.037,54.349) LED1.1@86.93,53.456
NetLED2_1: LED2.1 R02.1 | length 7
  Top Layer w0.254: R02.1@84.125,57.658 LED2.1@87.173,57.658 ; R02.1@84.495,57.288 cw(c85.387,56.395) 85.387,57.658 cw(c85.387,58.921) R02.1@84.495,58.028 ; LED2.1@86.803,57.288 ccw(c85.91,56.395) 85.91,57.658 ccw(c85.91,58.921) LED2.1@86.803,58.028
NetLED3_1: LED3.1 R03.1 | length 7
  Top Layer w0.254: R03.1@84.125,62.23 LED3.1@87.173,62.23 ; R03.1@84.495,61.86 cw(c85.387,60.967) 85.387,62.23 cw(c85.387,63.493) R03.1@84.495,62.6 ; LED3.1@86.803,61.86 ccw(c85.91,60.967) 85.91,62.23 ccw(c85.91,63.493) LED3.1@86.803,62.6
NetLED4_1: LED4.1 R04.1 | length 7
  Top Layer w0.254: R04.1@84.125,66.802 LED4.1@87.173,66.802 ; R04.1@84.495,66.432 cw(c85.387,65.539) 85.387,66.802 cw(c85.387,68.065) R04.1@84.495,67.172 ; LED4.1@86.803,66.432 ccw(c85.91,65.539) 85.91,66.802 ccw(c85.91,68.065) LED4.1@86.803,67.172
NetLED5_1: LED5.1 R05.1 | length 7
  Top Layer w0.254: R05.1@84.125,71.374 LED5.1@87.173,71.374 ; R05.1@84.495,71.004 cw(c85.387,70.111) 85.387,71.374 cw(c85.387,72.637) R05.1@84.495,71.744 ; LED5.1@86.803,71.004 ccw(c85.91,70.111) 85.91,71.374 ccw(c85.91,72.637) LED5.1@86.803,71.744
NetLED6_1: LED6.1 R06.1 | length 7
  Top Layer w0.254: R06.1@84.125,75.946 LED6.1@87.173,75.946 ; R06.1@84.495,75.576 cw(c85.387,74.683) 85.387,75.946 cw(c85.387,77.209) R06.1@84.495,76.316 ; LED6.1@86.803,75.576 ccw(c85.91,74.683) 85.91,75.946 ccw(c85.91,77.209) LED6.1@86.803,76.316
NetLED7_1: LED7.1 R07.1 | length 7
  Top Layer w0.254: R07.1@84.125,80.518 LED7.1@87.173,80.518 ; R07.1@84.495,80.148 cw(c85.387,79.255) 85.387,80.518 cw(c85.387,81.781) R07.1@84.495,80.888 ; LED7.1@86.803,80.148 ccw(c85.91,79.255) 85.91,80.518 ccw(c85.91,81.781) LED7.1@86.803,80.888
NetLED8_1: LED8.1 R08.1 | length 7
  Top Layer w0.254: R08.1@84.125,85.09 LED8.1@87.173,85.09 ; R08.1@84.495,84.72 cw(c85.387,83.827) 85.387,85.09 cw(c85.387,86.353) R08.1@84.495,85.46 ; LED8.1@86.803,84.72 ccw(c85.91,83.827) 85.91,85.09 ccw(c85.91,86.353) LED8.1@86.803,85.46
NetLed_1: Led.1 R4.1 | length 7
  Top Layer w0.254: R4.1@84.125,92.71 Led.1@87.173,92.71 ; R4.1@84.495,92.34 cw(c85.387,91.447) 85.387,92.71 cw(c85.387,93.973) R4.1@84.495,93.08 ; Led.1@86.803,92.34 ccw(c85.91,91.447) 85.91,92.71 ccw(c85.91,93.973) Led.1@86.803,93.08
NetP1_1: ISP.1 R1.2 | length 16.3
  Top Layer w0.254: ISP.1@143.18,105.93 cw(c143.18,104.426) 144.243,105.489 cw(c145.307,106.553) ISP.1@143.803,106.553 ; ISP.1@143.18,106.184 cw(c143.18,105.293) 143.81,105.923 cw(c144.44,106.553) ISP.1@143.549,106.553 ; ISP.1@143.18,106.553 148.514,101.219 R1.2@148.514,98.171 ; R1.2@148.144,98.541 ccw(c147.251,99.434) 148.514,99.434 ccw(c149.776,99.434) R1.2@148.884,98.541
NetP1_7: ISP.7 R2.2 | length 11.5
  Top Layer w0.254: ISP.7@150.8,106.553 153.594,103.759 R2.2@153.594,98.171 ; R2.2@153.224,98.541 ccw(c152.331,99.434) 153.594,99.434 ccw(c154.856,99.434) R2.2@153.964,98.541
NetP1_9: ISP.9 R3.2 | length 15.3
  Top Layer w0.254: ISP.9@153.34,105.93 cw(c153.34,104.426) 154.403,105.489 cw(c155.467,106.553) ISP.9@153.963,106.553 ; ISP.9@153.34,106.184 cw(c153.34,105.293) 153.97,105.923 cw(c154.6,106.553) ISP.9@153.709,106.553 ; ISP.9@153.34,106.553 156.134,103.759 R3.2@156.134,98.171 ; R3.2@155.764,98.541 ccw(c154.871,99.434) 156.134,99.434 ccw(c157.396,99.434) R3.2@156.504,98.541
NetP111_2: P111.2 R20.1 | length 43.1
  Top Layer w0.254: v1@133.647,97.147 cw(c133.261,96.761) 133.807,96.761 ; v1(133.782,97.282) 133.807,97.257 133.807,96.52 134.315,96.012 ; 133.807,96.883 cw(c134.18,96.883) v1@133.917,97.147 ; R20.1@135.064,95.67 ccw(c134.315,95.021) 134.315,96.012 ; R20.1@135.064,96.354 cw(c134.315,97.003) 134.315,96.012 ; R20.1@135.56,96.012 134.315,96.012
  Bottom Layer w0.254: P111.2@98.476,98.552 100.115,100.191 113.52,100.191 115.21,98.501 132.563,98.501 v1(133.782,97.282) ; v1@133.591,97.282 ccw(c133.131,97.282) 133.457,97.607 ccw(c133.782,97.932) v1@133.782,97.472
NetP111_4: P111.4 R21.1 | length 49.3
  Top Layer w0.254: v1@130.861,94.869 v1(130.886,94.894) 137.846,94.894 138.1,95.148 ; v1@131.021,94.76 cw(c131.346,94.434) 131.346,94.894 cw(c131.346,95.354) v1@131.021,95.029 ; R21.1@137.857,95.549 cw(c137.648,95.148) 138.1,95.148 ; R21.1@138.1,96.012 138.1,95.148 ; R21.1@138.342,95.549 ccw(c138.551,95.148) 138.1,95.148
  Bottom Layer w0.254: P111.4@101.016,97.929 cw(c101.016,96.425) 102.079,97.488 cw(c103.143,98.552) P111.4@101.639,98.552 ; P111.4@101.016,98.183 cw(c101.016,97.292) 101.646,97.922 cw(c102.276,98.552) P111.4@101.385,98.552 ; P111.4@101.016,98.552 102.425,97.143 102.425,95.504 103.048,94.881 104.064,94.881 104.687,95.504 104.687,96.266 104.724,96.266 105.842,97.384 127.051,97.384 129.565,94.869 v1@130.861,94.869 ; 130.365,94.869 ccw(c130.365,95.416) v1@130.751,95.029 ; 130.488,94.869 cw(c130.488,94.496) v1@130.751,94.76
NetP111_6: P111.6 R22.1 | length 50.1
  Top Layer w0.254: R22.1@140.336,95.586 cw(c139.915,94.996) 140.64,94.996 ; R22.1@140.64,96.012 140.64,94.996 ; R22.1@140.944,95.586 ccw(c141.365,94.996) 140.64,94.996 ; v1@141.8,94.353 ccw(c141.475,94.028) 141.475,94.488 ccw(c141.475,94.948) v1@141.8,94.623 ; v1(141.935,94.488) 141.148,94.488 140.64,94.996
  Bottom Layer w0.254: P111.6@103.556,98.552 104.687,99.683 113.012,99.683 114.702,97.993 131.064,97.993 134.569,94.488 v1(141.935,94.488) ; P111.6@103.556,98.921 ccw(c103.556,99.812) 104.186,99.182 ccw(c104.816,98.552) P111.6@103.925,98.552 ; P111.6@103.556,99.175 ccw(c103.556,100.679) 104.619,99.616 ccw(c105.683,98.552) P111.6@104.179,98.552 ; v1@141.8,94.353 ccw(c141.475,94.028) 141.475,94.488 ccw(c141.475,94.948) v1@141.8,94.623
NetP111_8: P111.8 R23.1 | length 73.6
  Top Layer w0.254: R23.1@143.18,96.012 144.424,96.012 ; R23.1@143.675,95.67 cw(c144.424,95.021) 144.424,96.012 ; R23.1@143.675,96.354 ccw(c144.424,97.003) 144.424,96.012 ; v1@145.021,96.799 cw(c144.561,96.799) 144.887,96.474 cw(c145.212,96.149) v1@145.212,96.609 ; v1(145.212,96.799) 144.424,96.012
  Bottom Layer w0.254: P111.8@105.473,98.552 cw(c103.969,98.552) 105.032,97.488 cw(c106.096,96.425) P111.8@106.096,97.929 ; P111.8@105.727,98.552 cw(c104.836,98.552) 105.466,97.922 cw(c106.096,97.292) P111.8@106.096,98.183 ; P111.8@106.096,98.552 104.965,97.421 103.036,97.421 102.413,98.044 102.413,98.933 101.663,99.683 100.369,99.683 99.746,99.06 99.746,98.044 98.984,97.282 97.968,97.282 97.333,97.917 97.333,99.72 98.425,100.813 113.919,100.813 115.443,99.289 142.723,99.289 v1(145.212,96.799) ; v1@145.021,96.799 ccw(c144.561,96.799) 144.887,97.125 ccw(c145.212,97.45) v1@145.212,96.99
P\E\N\: P11.1 PG.6 U1.1 | length 51.5
  Top Layer w0.254: P11.1@106.858,81.788 111.557,81.788 113.074,80.271 U1.1@113.074,79.152 ; P11.1@107.119,81.527 cw(c107.749,80.897) 107.749,81.788 cw(c107.749,82.679) P11.1@107.119,82.049 ; P11.1@107.298,81.347 cw(c108.362,80.284) 108.362,81.788 cw(c108.362,83.292) P11.1@107.298,82.229 ; U1.1@112.987,79.239 ccw(c112.777,79.449) 113.074,79.449 ccw(c113.371,79.449) U1.1@113.161,79.239
  Bottom Layer w0.254: PG.6@94.053,64.961 ccw(c92.675,64.997) 93.65,65.971 ; PG.6@94.307,64.955 ccw(c93.491,64.976) 94.068,65.553 ccw(c94.645,66.13) PG.6@94.666,65.314 ; PG.6@94.66,65.568 cw(c94.624,66.945) 93.65,65.971 ; PG.6@94.676,64.945 93.65,65.971 ; P11.1@106.235,81.788 ccw(c104.731,81.788) 105.794,82.852 ccw(c106.858,83.915) P11.1@106.858,82.411 ; P11.1@106.489,81.788 ccw(c105.598,81.788) 106.228,82.418 ccw(c106.858,83.048) P11.1@106.858,82.157 ; P11.1@106.858,81.788 105.461,83.185 94.412,83.185 93.65,82.423 93.65,65.971
PA0: P14.3 PA.1 U1.51 | length 52.8
  Top Layer w0.254: U1.51@124.887,81.289 ccw(c124.677,81.499) 124.974,81.499 ccw(c125.271,81.499) U1.51@125.061,81.289 ; U1.51@124.974,80.652 124.974,82.01 125.318,82.355 125.318,83.602 127.178,85.462 ; P14.3@126.759,86.407 cw(c125.903,85.462) 127.178,85.462 ; P14.3@126.93,86.595 cw(c126.422,86.035) 127.178,86.035 cw(c127.933,86.035) P14.3@127.426,86.595 ; P14.3@127.178,86.868 127.178,85.462 ; P14.3@127.596,86.407 ccw(c128.453,85.462) 127.178,85.462 ; v1@143.307,85.788 cw(c143.307,85.329) 143.632,85.654 cw(c143.957,85.979) v1@143.497,85.979 ; v1(143.307,85.979) 144.12,85.166 144.12,77.851 145.237,76.733 146.685,76.733 147.218,76.2 147.218,74.197 PA.1@146.078,73.056 ; PA.1@146.078,73.425 ccw(c146.078,74.316) 146.708,73.686 ccw(c147.338,73.056) PA.1@146.447,73.056 ; PA.1@146.078,73.679 ccw(c146.078,75.183) 147.141,74.12 ccw(c148.205,73.056) PA.1@146.701,73.056
  Bottom Layer w0.254: P14.3@127.178,86.245 cw(c127.178,84.741) 128.241,85.804 cw(c129.305,86.868) P14.3@127.801,86.868 ; P14.3@127.178,86.499 cw(c127.178,85.608) 127.808,86.238 cw(c128.438,86.868) P14.3@127.547,86.868 ; P14.3@127.178,86.868 128.702,85.344 142.672,85.344 v1(143.307,85.979) ; v1@143.116,85.979 cw(c142.656,85.979) 142.982,85.654 cw(c143.307,85.329) v1@143.307,85.788
PA1: P14.2 PA.2 U1.50 | length 70.8
  Top Layer w0.254: U1.50@125.687,81.289 ccw(c125.477,81.499) 125.774,81.499 ccw(c126.071,81.499) U1.50@125.861,81.289 ; U1.50@125.774,80.652 125.774,81.794 125.826,81.847 125.826,82.951 128.575,85.7 128.575,88.265 P14.2@129.718,89.408 133.293,92.983 147.825,92.983 148.733,92.075 148.733,88.286 147.726,87.28 147.726,72.415 146.812,71.501 145.339,71.501 144.196,72.644 144.196,74.549 144.932,75.286 144.932,75.317 145.212,75.596 ; P14.2@129.095,89.408 cw(c127.591,89.408) 128.654,88.344 cw(c129.718,87.281) P14.2@129.718,88.785 ; P14.2@129.349,89.408 cw(c128.458,89.408) 129.088,88.778 cw(c129.718,88.148) P14.2@129.718,89.039 ; P14.2@129.718,89.777 ccw(c129.718,90.668) 130.348,90.038 ccw(c130.978,89.408) P14.2@130.087,89.408 ; P14.2@129.718,90.031 ccw(c129.718,91.535) 130.781,90.472 ccw(c131.845,89.408) P14.2@130.341,89.408 ; 144.97,75.355 cw(c145.588,74.737) PA.2@146.021,75.496 ; 145.206,75.59 cw(c145.759,75.037) PA.2@146.147,75.717 ; PA.2@145.487,75.398 ccw(c145.212,75.306) 145.212,75.596 ; PA.2@145.487,75.794 cw(c145.212,75.886) 145.212,75.596 ; PA.2@146.078,75.596 145.212,75.596
PA2: P14.1 PA.3 U1.49 | length 52.7
  Top Layer w0.254: U1.49@126.487,81.289 ccw(c126.277,81.499) 126.574,81.499 ccw(c126.871,81.499) U1.49@126.661,81.289 ; U1.49@126.574,80.652 126.574,82.911 129.718,86.055 ; P14.1@129.556,86.266 cw(c129.499,86.055) 129.718,86.055 ; P14.1@129.718,87.237 ccw(c129.718,88.128) 130.348,87.498 ccw(c130.978,86.868) P14.1@130.087,86.868 ; P14.1@129.718,87.491 ccw(c129.718,88.995) 130.781,87.932 ccw(c131.845,86.868) P14.1@130.341,86.868 ; P14.1@129.88,86.266 ccw(c129.936,86.055) 129.718,86.055 ; PA.3@145.455,78.136 ccw(c143.951,78.136) 145.014,79.2 ccw(c146.078,80.263) PA.3@146.078,78.759 ; PA.3@145.709,78.136 ccw(c144.818,78.136) 145.448,78.766 ccw(c146.078,79.396) PA.3@146.078,78.505 ; PA.3@146.078,78.136 144.932,79.281 144.932,86.378 145.72,87.165 146.744,87.165 147.717,88.138 147.717,91.948 147.19,92.475 135.325,92.475 P14.1@129.718,86.868 129.718,86.055
PA3: P13.16 PA.4 U1.48 | length 33
  Top Layer w0.254: U1.48@128.074,79.152 128.956,79.152 133.624,83.82 135.306,83.82 P13.16@137.338,81.788 ; U1.48@128.624,79.021 ccw(c128.624,79.506) 128.967,79.163 ; U1.48@128.624,79.275 ccw(c128.624,80.373) 129.401,79.597 ; U1.48@128.711,79.065 cw(c128.921,78.855) 128.921,79.152 cw(c128.921,79.449) U1.48@128.711,79.239 ; P13.16@136.715,81.788 ccw(c135.211,81.788) 136.274,82.852 ccw(c137.338,83.915) P13.16@137.338,82.411 ; P13.16@136.969,81.788 ccw(c136.078,81.788) 136.708,82.418 ccw(c137.338,83.048) P13.16@137.338,82.157
  Bottom Layer w0.254: P13.16@137.338,81.788 144.689,81.788 PA.4@145.801,80.676 ; P13.16@137.599,81.527 cw(c138.229,80.897) 138.229,81.788 cw(c138.229,82.679) P13.16@137.599,82.049 ; P13.16@137.778,81.347 cw(c138.842,80.284) 138.842,81.788 cw(c138.842,83.292) P13.16@137.778,82.229 ; 144.827,81.649 ccw(c145.744,82.566) PA.4@145.969,81.289 ; 145.172,81.305 ccw(c145.848,81.98) PA.4@146.014,81.039 ; 145.21,81.267 cw(c144.62,80.676) PA.4@145.455,80.676
PA4: P13.15 PA.5 U1.47 | length 24.1
  Top Layer w0.254: U1.47@128.074,78.352 130.325,78.352 133.761,81.788 ; U1.47@128.711,78.265 cw(c128.921,78.055) 128.921,78.352 cw(c128.921,78.649) U1.47@128.711,78.439 ; P13.15@134.248,81.495 ccw(c133.761,81.236) 133.761,81.788 ; P13.15@134.248,82.081 cw(c133.761,82.34) 133.761,81.788 ; P13.15@134.798,81.788 133.761,81.788
  Bottom Layer w0.254: P13.15@134.449,82.304 ccw(c134.003,82.962) 134.798,82.962 ; P13.15@134.798,81.788 134.798,82.962 ; P13.15@135.147,82.304 cw(c135.592,82.962) 134.798,82.962 ; PA.5@146.078,83.216 145.867,83.427 135.263,83.427 134.798,82.962
PA5: P13.14 PA.6 U1.46 | length 36.6
  Top Layer w0.254: U1.46@128.074,77.552 130.532,77.552 133.498,80.518 136.068,80.518 P13.14@137.338,79.248 138.481,80.391 v1(138.481,86.487) ; U1.46@128.711,77.465 cw(c128.921,77.255) 128.921,77.552 cw(c128.921,77.849) U1.46@128.711,77.639 ; P13.14@136.715,79.248 ccw(c135.211,79.248) 136.274,80.312 ccw(c137.338,81.375) 137.338,79.871 ccw(c137.338,81.375) 138.401,80.312 ccw(c139.465,79.248) P13.14@137.961,79.248 ; P13.14@136.969,79.248 ccw(c136.078,79.248) 136.708,79.878 ccw(c137.338,80.508) 137.338,79.617 ccw(c137.338,80.508) 137.968,79.878 ccw(c138.598,79.248) P13.14@137.707,79.248 ; v1@138.346,86.352 cw(c138.021,86.027) 138.481,86.027 cw(c138.941,86.027) v1@138.616,86.352
  Bottom Layer w0.254: v1(138.481,86.487) 139.37,87.376 144.265,87.376 PA.6@145.885,85.756 ; v1@138.481,86.677 ccw(c138.481,87.137) 138.806,86.812 ccw(c139.131,86.487) v1@138.671,86.487
PA6: P13.13 PA.7 U1.45 | length 43.1
  Top Layer w0.254: U1.45@128.074,76.752 130.543,76.752 133.039,79.248 P13.13@134.798,79.248 135.687,79.248 ; U1.45@128.711,76.665 cw(c128.921,76.455) 128.921,76.752 cw(c128.921,77.049) U1.45@128.711,76.839 ; P13.13@134.357,78.807 ccw(c133.294,77.744) 133.294,79.248 ccw(c133.294,80.752) P13.13@134.357,79.689 ; P13.13@134.537,78.987 ccw(c133.907,78.357) 133.907,79.248 ccw(c133.907,80.139) P13.13@134.537,79.509 ; P13.13@135.383,79.035 cw(c135.687,78.925) 135.687,79.248 ; P13.13@135.383,79.461 ccw(c135.687,79.571) 135.687,79.248 ; PA.7@146.078,88.296 147.209,89.427 147.209,91.44 146.682,91.967 145.474,91.967 140.691,87.184 140.691,80.098 138.697,78.105 136.83,78.105 135.687,79.248 ; PA.7@146.078,88.665 ccw(c146.078,89.556) 146.708,88.926 ccw(c147.338,88.296) PA.7@146.447,88.296 ; PA.7@146.078,88.919 ccw(c146.078,90.423) 147.141,89.36 ccw(c148.205,88.296) PA.7@146.701,88.296
PA7: P13.12 PA.8 U1.44 | length 40.3
  Top Layer w0.254: U1.44@128.074,75.952 131.58,75.952 133.583,77.955 136.09,77.955 P13.12@137.338,76.708 138.679,76.708 ; U1.44@128.711,75.865 cw(c128.921,75.655) 128.921,75.952 cw(c128.921,76.249) U1.44@128.711,76.039 ; P13.12@136.715,76.708 ccw(c135.211,76.708) 136.274,77.772 ccw(c137.338,78.835) P13.12@137.338,77.331 ; P13.12@136.969,76.708 ccw(c136.078,76.708) 136.708,77.338 ccw(c137.338,77.968) P13.12@137.338,77.077 ; P13.12@137.62,76.47 cw(c138.132,76.038) 138.132,76.708 cw(c138.132,77.378) P13.12@137.62,76.946 ; P13.12@137.814,76.306 cw(c138.678,75.577) 138.678,76.708 ; P13.12@137.814,77.11 ccw(c138.678,77.839) 138.678,76.708 ; PA.8@145.455,90.836 cw(c143.951,90.836) 145.014,89.772 cw(c146.078,88.709) PA.8@146.078,90.213 ; PA.8@145.709,90.836 cw(c144.818,90.836) 145.448,90.206 cw(c146.078,89.576) PA.8@146.078,90.467 ; PA.8@146.078,90.836 141.199,85.957 141.199,79.228 138.679,76.708
PB0: P11.10 PB.1 U1.10 | length 113
  Top Layer w0.254: P11.10@104.318,71.005 cw(c104.318,69.501) 105.381,70.564 cw(c106.445,71.628) P11.10@104.941,71.628 ; P11.10@104.318,71.259 cw(c104.318,70.368) 104.948,70.998 cw(c105.578,71.628) P11.10@104.687,71.628 ; P11.10@104.318,71.628 105.664,70.282 109.125,70.282 110.795,71.952 U1.10@113.074,71.952 ; U1.10@112.437,71.865 ccw(c112.227,71.655) 112.227,71.952 ccw(c112.227,72.249) U1.10@112.437,72.039 ; 124.876,73.905 cw(c124.377,73.406) v1@125.082,73.406 ; v1@125.133,78.943 cw(c124.673,78.943) 124.998,78.618 cw(c125.324,78.293) v1@125.324,78.753 ; v1@125.324,73.457 124.892,73.889 124.892,78.511 v1(125.324,78.943) ; v1(130.988,83.21) 136.042,88.265 138.989,88.265 139.649,87.605 v1(139.649,80.645) ; v1@130.988,83.401 ccw(c130.988,83.861) 131.313,83.536 ccw(c131.638,83.21) v1@131.178,83.21 ; v1@139.514,80.78 ccw(c139.189,81.105) 139.649,81.105 ccw(c140.109,81.105) v1@139.784,80.78 ; v1@140.124,72.55 ccw(c139.799,72.875) 140.259,72.875 ccw(c140.719,72.875) v1@140.394,72.55 ; v1(140.259,72.415) 140.259,77.445 v1(142.723,79.908) ; v1@142.532,79.908 cw(c142.072,79.908) 142.397,79.583 cw(c142.723,79.258) v1@142.723,79.718 ; PB.1@146.124,67.914 147.594,67.914 ; PB.1@146.389,67.657 cw(c146.994,67.071) 146.994,67.914 cw(c146.994,68.757) PB.1@146.389,68.171 ; PB.1@146.571,67.481 cw(c147.594,66.491) 147.594,67.914 ; PB.1@146.571,68.347 ccw(c147.594,69.337) 147.594,67.914 ; v1@149.268,70.858 cw(c148.943,70.533) 149.403,70.533 cw(c149.863,70.533) v1@149.538,70.858 ; v1(149.403,70.993) 149.403,69.723 147.594,67.914
  Bottom Layer w0.254: P11.10@104.318,71.628 105.715,73.025 107.62,73.025 108.098,73.503 108.098,74.392 108.636,74.93 117.018,74.93 118.161,73.787 124.993,73.787 v1@125.324,73.457 ; P11.10@104.318,71.997 ccw(c104.318,72.888) 104.948,72.258 ccw(c105.578,71.628) P11.10@104.687,71.628 ; P11.10@104.318,72.251 ccw(c104.318,73.755) 105.381,72.692 ccw(c106.445,71.628) P11.10@104.941,71.628 ; 124.943,73.838 cw(c124.593,73.489) v1@125.084,73.429 ; v1(125.324,78.943) 129.591,83.21 v1(130.988,83.21) ; v1@125.324,79.134 ccw(c125.324,79.594) 125.649,79.268 ccw(c125.974,78.943) v1@125.514,78.943 ; v1@130.853,83.076 ccw(c130.528,82.75) 130.528,83.21 ccw(c130.528,83.67) v1@130.853,83.345 ; v1(139.649,80.645) 141.986,80.645 v1(142.723,79.908) ; v1@139.784,80.51 cw(c140.109,80.185) 140.109,80.645 cw(c140.109,81.105) v1@139.784,80.78 ; v1@140.259,72.225 cw(c140.259,71.765) 140.584,72.09 cw(c140.909,72.415) v1@140.449,72.415 ; v1(140.259,72.415) 141.681,70.993 v1(149.403,70.993) ; v1@142.532,79.908 ccw(c142.072,79.908) 142.397,80.234 ccw(c142.723,80.559) v1@142.723,80.099 ; v1@149.268,70.858 ccw(c148.943,70.533) 148.943,70.993 ccw(c148.943,71.453) v1@149.268,71.128
  other v1: 125.273,73.406